# Altium PCB WCE_Power_Backscatter.PcbDoc
Units mm, origin at the board's own origin, x right, y up, seen from the top; angles counter-clockwise.
Board outline 9.5 x 9.5 mm, 4 copper layers (Top Layer, GND, PWR, Bottom Layer); 12 components, 7 nets, 36 pads, 18 vias.
Unrouted connection lines stored in the file: 3.
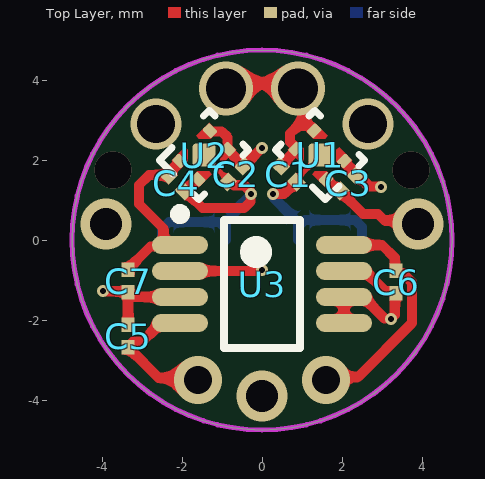
[diagram p0: Top Layer view]
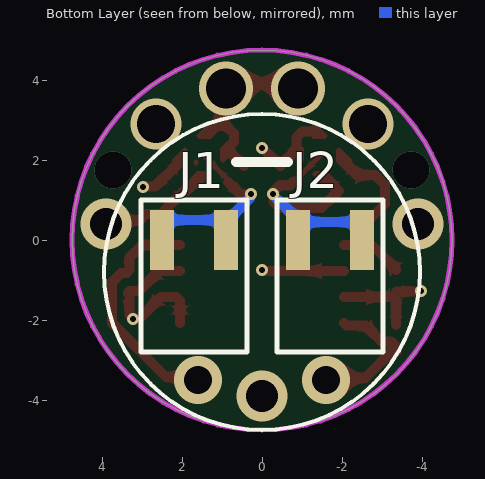
[diagram p1: Bottom Layer view, seen from below]
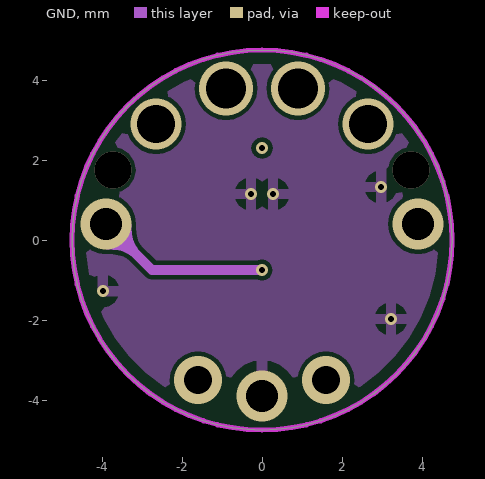
[diagram p2: GND]
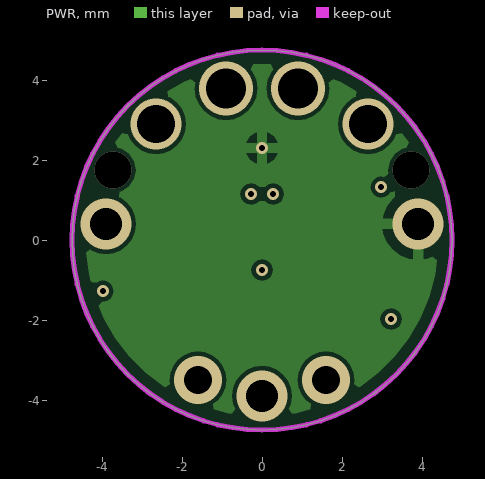
[diagram p3: PWR]

## Layer stack, top to bottom
Top Solder: solder mask 0.0102, Solder Resist, Dk 3.5
Top Layer: signal copper 0.0356
Dielectric1: core 0.32, FR-4, Dk 4.8
GND: signal copper 0.0356
Dielectric2: prepreg 0.32, FR-4, Dk 4.8
PWR: signal copper 0.0356
Dielectric3: core 0.32, FR-4, Dk 4.8
Bottom Layer: signal copper 0.0356
Bottom Solder: solder mask 0.0102, Solder Resist, Dk 3.5

## Board outline
-4.75,0 ccw(c0,0) 0,-4.75 ccw(c0,0) 4.75,0 ccw(c0,0) 0,4.75 ccw(c0,0)

## Design rules (kind name [scope] priority, off if disabled: settings)
Clearance [All] p1: gap=0.11 ignorepadtopadclearanceinfootprint=TRUE
ComponentClearance [All] p1: gap=0.2 collisioncheckmode=3 verticalgap=0.2 showdistances=FALSE
MinimumSolderMaskSliver [All] p1: minsoldermaskwidth=0.15
PolygonConnect [All] p1: connectstyle=Relief reliefconductorwidth=0.254 reliefentries=4 polygonreliefangle="90 Angle" airgapwidth=0.254
RoutingVias [All] p1: holewidth=0.15 width=0.3 viastyle="Through Hole" minholewidth=0.15 minwidth=0.3 maxholewidth=1 maxwidth=1.5
SilkToSilkClearance [All] p1: silktosilkclearance=0.15
SilkToSolderMaskClearance [IsPad] p1: minsilkscreentomaskgap=0.15 clearancetoexposedcopper=TRUE
SolderMaskExpansion [All] p1: expansion=0.102 istentingtop=FALSE
Width [All] p1: maxlimit=0.254 minlimit=0.1 preferedwidth=0.127
26 further rules are at their usual default settings.

## Components (designator, comment, footprint, x,y, rotation, side; value= is the part's Value field where it differs from the comment)
C1 "0.1uF" CAPC0603X33X15LL03T05 0.66,1.65 r135 top
C2 "0.1uF" CAPC0603X33X15LL03T05 -0.66,1.65 r45 top
C3 "0.1uF" CAPC0603X33X15LL03T05 2.15,1.425 r225 top
C4 "0.1uF" CAPC0603X33X15LL03T05 -2.15,1.425 r135 top
C5 "3nF" CAPC0603X33X15LL03T05 -3.35,-2.4 r270 top
C6 "3nF" CAPC0603X33X15LL03T05 3.35,-1.05 r90 top
C7 "0.1uF" CAPC0603X33X15LL03T05 -3.35,-1.025 r90 top
J1 "2040852-1" 2040852-1 1.7,-1 r90 bottom
J2 "2040852-1" 2040852-1 -1.7,-1 r90 bottom
U1 "TLV71733PDQNT" DQN0004A_V 1.45,2.125 r135 top
U2 "TLV71725PDQNT" DQN0004A_V -1.45,2.125 r45 top
U3 "ADG902BRMZ" ADI-RM-8_L 0,-1.1 r0 top

## Footprints (in the part's own frame and the unit in brackets; to place one, negate y for a bottom-side part, rotate by r counter-clockwise, add the part's x,y. Pads: shape width x height; smd on the part's side, far side on the other; paste and mask are expansions set on the pad)
2040852-1 [mm] "PCB Spring"
  rect 1.5x0.6 smd: 1(1,-0.8) 1(1,0.8)
  silkscreen extent -1.8,-1.33 2,1.33, body extent -1.65,-1 1.75,1, height 0.81
ADI-RM-8_L [mm] "TSOP, 8-Leads, Body 3x3mm, Pitch 0.65mm, IPC High Density"
  oval 1.4x0.45 smd: 1(-2.05,0.975) 2(-2.05,0.325) 3(-2.05,-0.325) 4(-2.05,-0.975) 5(2.05,-0.975) 6(2.05,-0.325) 7(2.05,0.325) 8(2.05,0.975)
  silkscreen extent -2.17,-1.6 0.95,1.87, body extent -1.6,-1.6 1.6,1.6, height 1.1
CAPC0603X33X15LL03T05 [mm] "Chip Capacitor, 2-Leads, Body 0.60x0.30mm, IPC High Density"
  rect 0.36x0.32 smd: 1(-0.28,0) 2(0.28,0)
  body extent -0.32,-0.17 0.32,0.17, height 0.33
DQN0004A_V [mm] "SON, Body 1.05x1.05mm, Pitch 0.65mm"
  rrect32% 0.25x0.31 smd paste-1 mask-0.31: 1(-0.535,0.325) 2(-0.535,-0.325) 3(0.535,-0.325) 4(0.535,0.325)
  rrect34% 0.58x0.58 smd rot 45 paste-0.065 mask-0.05: 5(0,0)
  Top Layer region: -0.66,0.48 -0.2,0.48 -0.2,0.379 -0.409,0.17 -0.66,0.17
  Top Layer region: 0.66,0.48 0.2,0.48 0.2,0.379 0.409,0.17 0.66,0.17
  Top Layer region: 0.66,-0.48 0.2,-0.48 0.2,-0.379 0.409,-0.17 0.66,-0.17
  Top Layer region: -0.66,-0.48 -0.2,-0.48 -0.2,-0.379 -0.409,-0.17 -0.66,-0.17
  silkscreen extent -0.88,-0.7 0.88,0.7, body extent -0.52,-0.52 0.53,0.53, height 0.42

## Part data
C1 C2 C3 C4 C7: library part CMP-2010-00159-1, "Capacitor 0.1 uF 0201 XR5", Manufacturer="AVX Interconnect / Elco", Part Number=02016D104KAT2A
C5 C6: library part CMP-2010-00159-1, "Capacitor 3 nF 0201 XR5", Manufacturer="AVX Interconnect / Elco", Part Number=02016D104KAT2A
J1 J2: "TE connectivity 2040852-1 PCB Spring Contact"
U1: library part CMP-0394-01289-2, "Single Output Low Noise LDO, 150 mA, Fixed 3.3 V Output, 1.7 to 5.5 V Input, 4-pin X2SON (DQN), -40 to 85 degC, Green (RoHS & no Sb/Br)", Manufacturer="Texas Instruments", Accuracy(%)=1.5, ComponentLink1Description="Manufacturer URL", ComponentLink1URL=http://www.ti.com/, ComponentLink2Description=Datasheet, ComponentLink2URL=http://www.ti.com/general/docs/lit/getliterature.tsp?genericPartNumber=TLV71733P&fileType=pdf, DatasheetVersion=SBVS176A, Eco-Plan="Green (RoHS & no Sb/Br)", Fixed Output Options(V)=3.3, Iout(Max)(A)=0.15, Iq(Typ)(mA)=0.03, Mounting Technology="Surface Mount", PackageDescription="4-Pin Plastic Small Outline, Body 1 x 1 mm, Pitch 0.65 mm", PackageReference=DQN0004A, PackageVersion=4210367/D, PartNumber=TLV71733PDQNT, SubFamily="Single Channel LDO", Vdo(Typ)(mV)=360, Vin(Max)(V)=5.5, Vin(Min)(V)=1.7, Vout Adj(Max)(V)=3.3, Vout Adj(Min)(V)=3.3
U2: library part CMP-0394-01296-2, "Single Output Low Noise LDO, 150 mA, Fixed 2.5 V Output, 1.7 to 5.5 V Input, 4-pin X2SON (DQN), -40 to 85 degC, Green (RoHS & no Sb/Br)", Manufacturer="Texas Instruments", Accuracy(%)=1.5, ComponentLink1Description="Manufacturer URL", ComponentLink1URL=http://www.ti.com/, ComponentLink2Description=Datasheet, ComponentLink2URL=http://www.ti.com/general/docs/lit/getliterature.tsp?genericPartNumber=TLV71725P&fileType=pdf, DatasheetVersion=SBVS176A, Eco-Plan="Green (RoHS & no Sb/Br)", Fixed Output Options(V)=2.5, Iout(Max)(A)=0.15, Iq(Typ)(mA)=0.03, Mounting Technology="Surface Mount", PackageDescription="4-Pin Plastic Small Outline, Body 1 x 1 mm, Pitch 0.65 mm", PackageReference=DQN0004A, PackageVersion=4210367/D, PartNumber=TLV71725PDQNT, SubFamily="Single Channel LDO", Vdo(Typ)(mV)=360, Vin(Max)(V)=5.5, Vin(Min)(V)=1.7, Vout Adj(Max)(V)=2.5, Vout Adj(Min)(V)=2.5
U3: library part CMP-0290-00054-1, "RF Switch, Wideband, 40 dB Isolation at 1 GHz, CMOS 1.65 V to 2.75 V, SPST Switches, RM-8, Pb-Free, 50 Tube", Off Isolation Test Freq=1G, Supply Voltage="Single (+1.65V to +2.75V)", # Sw Functions=1, Bandwidth=4.5GHz, Code_JEDEC=MO-187-AA, ComponentLink1Description="Manufacturer URL", ComponentLink1URL=www.analog.com, ComponentLink2Description=Datasheet, ComponentLink2URL=http://www.analog.com/static/imported-files/data_sheets/ADG901_902.pdf, ComponentLink3Description="Package Specification", ComponentLink3URL=http://www.analog.com/static/imported-files/packages/PKG_PDF/MSOP%28RM%29/RM_8.pdf, Configuration=SPST/NO, DatasheetVersion=RevB, Insertion Loss (dB)=800mdB, Off Isolation=37dB, P-1dB (dBm)=17, PackageDescription="8-Lead Mini Small Outline Package [MSOP]", PackageReference=RM-8, PackageVersion=Aug-2005

## Via types
v1: diameter 0.3, hole 0.15, Top Layer to Bottom Layer, 7 vias
v2: diameter 1.27, hole 0.8, Top Layer to Bottom Layer, 3 vias
v3: diameter 1.35, hole 1, Top Layer to Bottom Layer, 2 vias
v4: diameter 1.2, hole 0.7, Top Layer to Bottom Layer, 2 vias
v5: diameter 0.92, hole 0.92, Top Layer to Bottom Layer, 2 vias
v6: diameter 1.27, hole 0.95, Top Layer to Bottom Layer, 2 vias

## Nets (pads, with @x,y where several pads share a name; then routed paths per layer and width w, separated by ;. In a path a pad name is that pad's centre, name@x,y a point inside that pad or via, vN(x,y) a via of type N, cw(c..) or ccw(c..) an arc to the next point about the centre after c; other vN are vias at no path point)
2V5: C4.2 C7.2 U2.1 U3.1 | length 4.5
  Top Layer w0.254: C7.2 -3.35,-0.725 -2.788,-0.163 U3.1@-2.578,-0.163 ; U3.1@-2.578,-0.125 -2.462,-0.125 -2.462,0.287 -3.075,0.9 -3.075,1.375 -2.827,1.623 -2.423,1.623 -2.409,1.637 -2.362,1.637 C4.2 -2.348,1.655 -2.044,1.959 -2.044,1.962 U2.1 ; U3.1@-2.371,-0.125 U3.1
GND: C1.1 C2.1 C3.1 C4.1 C5.1 C6.1 C7.1 J1.1 J2.1 U1.2 U1.5 U2.2 U2.5 U3.3 U3.5 U3.6 U3.7 | length 20.5
  Top Layer w0.127: U2.5 -1.45,2.106 C2.1@-0.848,1.504 ; C1.1@0.848,1.452 0.848,1.504 1.45,2.106 U1.5 ; U1.5@1.65,1.931 U1.5@1.65,1.95
  Top Layer w0.254: v1(-3.975,-1.275) -3.966,-1.284 -3.371,-1.284 C7.1 C5.1 ; C7.1@-3.25,-1.425 U3.3 ; U2.2 -1.613,1.531 -1.616,1.531 -1.92,1.227 -1.914,1.227 -1.487,0.8 -0.447,0.8 -0.284,0.963 -0.284,1.141 v1(-0.275,1.15) -0.284,1.159 -0.284,1.208 -0.447,1.371 -0.702,1.371 -0.797,1.466 C2.1@-0.839,1.466 ; v1(0.275,1.15) 0.546,1.15 0.83,1.434 C1.1@0.848,1.452 ; U3.5 2.05,-1.516 2.141,-1.425 2.528,-1.425 3.07,-1.966 ; U3.7 2.578,-0.775 3.08,-1.277 3.317,-1.277 3.35,-1.31 C6.1 3.317,-1.363 3.317,-1.871 3.225,-1.963 v1(3.225,-1.975) ; U1.2 2.044,1.962 2.044,1.959 2.348,1.655 C3.1 2.393,1.623 2.682,1.334 2.966,1.334 v1(2.975,1.325)
  Bottom Layer w0.254: J2.1@-2.5,0 -2.5,0.277 -2.327,0.45 -1.073,0.45 J2.1@-0.986,0.363 ; J2.1@-0.9,0 -0.9,0.5 -0.85,0.5 -0.727,0.623 -0.727,0.673 -0.284,1.116 -0.284,1.129 -0.271,1.141 v1@-0.259,1.141 ; v1(0.275,1.15) 0.284,1.141 0.284,1.066 0.9,0.45 J1.1@0.9,0.327 ; J1.1@0.9,0 J1.1@0.9,0.327 ; J1.1@2.5,0 2.5,0.327 2.327,0.5 1.073,0.5 J1.1@0.9,0.327
  other v2: 0,-3.9
RF1: C5.2 U3.4 | length 3.6
  Top Layer w0.254: C5.2 -3.35,-2.7 -3.317,-2.733 -3.297,-2.733 -2.581,-3.449 -1.651,-3.449 v4(-1.6,-3.5) ; C5.2@-3.317,-2.627 -3.227,-2.537 -2.987,-2.537 -2.589,-2.139 -2.114,-2.139 U3.4
RF2: C6.2 U3.8 | length 6
  Top Layer w0.254: v4(1.6,-3.5) 1.677,-3.423 2.402,-3.423 3.747,-2.078 3.747,-1.052 3.518,-0.823 3.383,-0.823 3.35,-0.79 C6.2 3.317,-0.737 3.317,-0.442 3,-0.125 U3.8
SPI_DATA: U3.2 | length 6.4
  Top Layer w0.254: U3.2 -0.037,-0.775 -0.012,-0.75 v1(0,-0.75)
  GND w0.254: v2(-3.9,0.4) -2.75,-0.75 v1(0,-0.75)
V_BAT: C1.2 U1.3 U1.4 | length 4.7
  Top Layer w0.254: v3(-0.9,3.79) -0.764,3.926 0.764,3.926 1.036,3.654 1.036,2.999 ; C1.2@0.452,1.848 0.823,2.219 0.823,2.255 U1.4 0.86,2.292 0.86,2.295 0.701,2.454 0.701,2.664 1.036,2.999 ; U1.3 1.036,2.999
  other v3: 0.9,3.79
VDD: C2.2 C3.2 U1.1 U2.3 U2.4 | length 4.8
  Top Layer w0.254: U2.4@-1.28,2.715 -1.009,2.715 -0.86,2.566 -0.86,2.295 -0.824,2.258 -0.824,2.219 C2.2@-0.455,1.85 ; U2.3@-0.842,2.271 U2.3 ; C2.2 -0.457,1.848 C2.2@-0.455,1.85 ; v1(0,2.3) -0.005,2.3 C2.2@-0.455,1.85 ; U1.1@1.605,1.517 1.906,1.216 C3.2@1.941,1.216 ; C3.2@1.952,1.23 2.532,0.65 2.9,0.65 3.061,0.489 3.811,0.489 v2(3.9,0.4)
copper on no net:
  other v5: -3.725,1.75 3.725,1.75
  other v6: -2.65,2.9 2.65,2.9

## Polygon pours and split planes (outlines as drawn)
VDD on PWR "VDD_L03_P004" (solid, pour order 4): -4.4,0 ccw(c0,0) 0,-4.4 ccw(c0,0) 4.4,0 ccw(c0,0) 0,4.4 ccw(c0,0)
GND on GND "GND_L02_P003" (solid, pour order 3): -4.4,0 ccw(c0,0) 0,-4.4 ccw(c0,0) 4.4,0 ccw(c0,0) 0,4.4 ccw(c0,0)

## Keep-outs
Keep-Out Layer:
  the board outline again, w0.127

## Silkscreen, mask and mechanical layers (free items; w line width, h text height)
Bottom Overlay:
  circle w0.1: c0,-0.8 r3.95
  lines w0.254: -0.65,1.95 0.65,1.95